# Altium PCB Memory Address Register.PcbDoc
Units mil, origin at the board's own origin, x right, y up, seen from the top; angles counter-clockwise.
Board outline 5200 x 2700 mil, 2 copper layers (Top Layer, Bottom Layer); 58 components, 97 nets, 466 pads, 0 vias.
Unrouted connection lines stored in the file: 298.
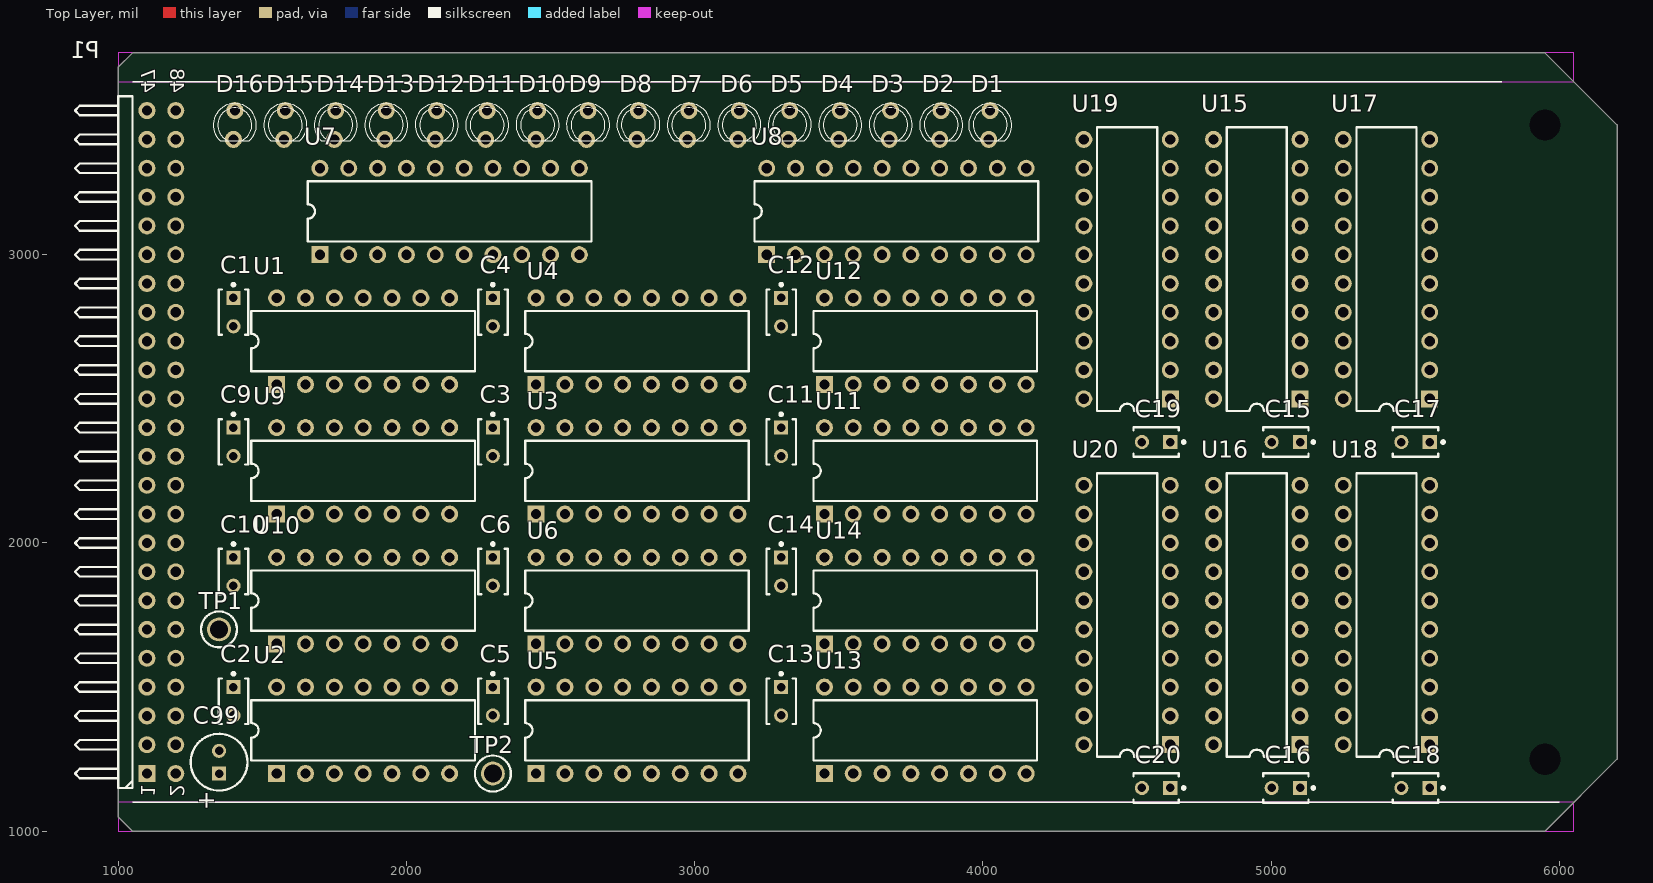
[diagram p0: Top Layer view]
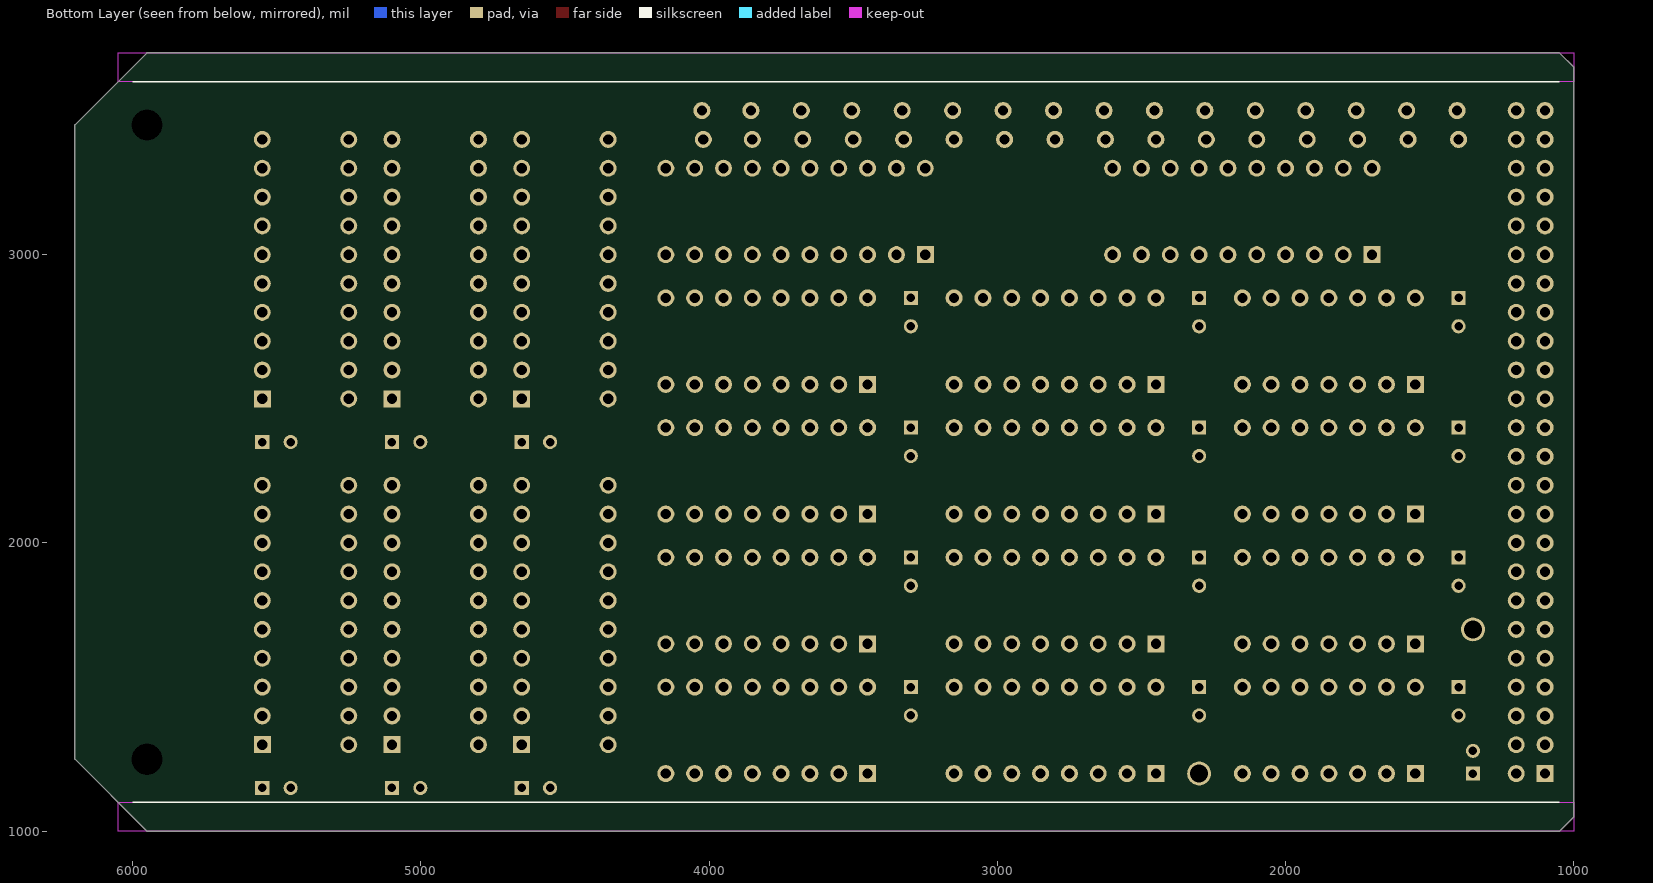
[diagram p1: Bottom Layer view, seen from below]

## Layer stack, top to bottom
Top Solder: solder mask 0.4, Solder Resist, Dk 3.5
Top Layer: signal copper 1.4
Dielectric 1: dielectric 12.6, FR-4, Dk 4.8
Bottom Layer: signal copper 1.4
Bottom Solder: solder mask 0.4, Solder Resist, Dk 3.5

## Board outline
1000,3650 1050,3700 5950,3700 6200,3450 6200,1250 5950,1000 1050,1000 1000,1050

## Design rules (kind name [scope] priority, off if disabled: settings)
Clearance [All] p1: gap=10 ignorepadtopadclearanceinfootprint=FALSE except(0: Arc-Hole Track-Hole SMDPad-Hole THPad-Hole Via-Hole Fill-Hole Poly-Hole Region-Hole Text-Hole)
PolygonConnect [All] p1: connectstyle=Relief reliefconductorwidth=10 reliefentries=4 polygonreliefangle="90 Angle" airgapwidth=10
RoutingVias [All] p1: holewidth=28 width=50 viastyle="Through Hole" minholewidth=28 minwidth=50 maxholewidth=28 maxwidth=50
SolderMaskExpansion [All] p1: expansion=4 istentingtop=FALSE
Width [All] p1: maxlimit=10 minlimit=10 preferedwidth=10
30 further rules are at their usual default settings.

## Classes and differential pairs
net class SAR[0..15]: SAR0 SAR1 SAR2 SAR3 SAR4 SAR5 SAR6 SAR7 SAR8 SAR9 SAR10 SAR11 SAR12 SAR13 SAR14 SAR15
net class MAR[0..15]: MAR0 MAR1 MAR2 MAR3 MAR4 MAR5 MAR6 MAR7 MAR8 MAR9 MAR10 MAR11 MAR12 MAR13 MAR14 MAR15
net class BUS[0..7]: BUS0 BUS1 BUS2 BUS3 BUS4 BUS5 BUS6 BUS7
net class ADDR[0..15]: ADDR0 ADDR1 ADDR2 ADDR3 ADDR4 ADDR5 ADDR6 ADDR7 ADDR8 ADDR9 ADDR10 ADDR11 ADDR12 ADDR13 ADDR14 ADDR15
component class SAR: C9 C10 C11 C12 C13 C14 C19 C20 U9 U10 U11 U12 U13 U14 U19 U20
component class MUX: C15 C16 C17 C18 U15 U16 U17 U18
component class Top: C99 D1 D2 D3 D4 D5 D6 D7 D8 D9 D10 D11 D12 D13 D14 D15 D16 P1 TP1 TP2 U1 U7 U8
component class MAR: C1 C2 C3 C4 C5 C6 U2 U3 U4 U5 U6

## Components (designator, comment, footprint, x,y, rotation, side; value= is the part's Value field where it differs from the comment)
C1 "K104K15X7RF5TL2" VISH-K104K15X7RF5TL2 1400,2800.79 r270 top
C2 "K104K15X7RF5TL2" VISH-K104K15X7RF5TL2 1400,1450.79 r270 top
C3 "K104K15X7RF5TL2" VISH-K104K15X7RF5TL2 2300,2350.79 r270 top
C4 "K104K15X7RF5TL2" VISH-K104K15X7RF5TL2 2300,2800.79 r270 top
C5 "K104K15X7RF5TL2" VISH-K104K15X7RF5TL2 2300,1450.79 r270 top
C6 "K104K15X7RF5TL2" VISH-K104K15X7RF5TL2 2300,1900.79 r270 top
C9 "K104K15X7RF5TL2" VISH-K104K15X7RF5TL2 1400,2350.79 r270 top
C10 "K104K15X7RF5TL2" VISH-K104K15X7RF5TL2 1400,1900.79 r270 top
C11 "K104K15X7RF5TL2" VISH-K104K15X7RF5TL2 3300,2350.79 r270 top
C12 "K104K15X7RF5TL2" VISH-K104K15X7RF5TL2 3300,2800.79 r270 top
C13 "K104K15X7RF5TL2" VISH-K104K15X7RF5TL2 3300,1450.79 r270 top
C14 "K104K15X7RF5TL2" VISH-K104K15X7RF5TL2 3300,1900.79 r270 top
C15 "K104K15X7RF5TL2" VISH-K104K15X7RF5TL2 5050.79,2350 r180 top
C16 "K104K15X7RF5TL2" VISH-K104K15X7RF5TL2 5050.79,1150 r180 top
C17 "K104K15X7RF5TL2" VISH-K104K15X7RF5TL2 5500.79,2350 r180 top
C18 "K104K15X7RF5TL2" VISH-K104K15X7RF5TL2 5500.79,1150 r180 top
C19 "K104K15X7RF5TL2" VISH-K104K15X7RF5TL2 4600.79,2350 r180 top
C20 "K104K15X7RF5TL2" VISH-K104K15X7RF5TL2 4600.79,1150 r180 top
C99 "Cap Pol5" C5x7 1350,1239.37 r90 top value=10uF
D1 "LED Red" "LED 3mm RED" 4025,3450 r270 top
D2 "LED Red" "LED 3mm RED" 3855,3450 r270 top
D3 "LED Red" "LED 3mm RED" 3680,3450 r270 top
D4 "LED Red" "LED 3mm RED" 3505,3450 r270 top
D5 "LED Red" "LED 3mm RED" 3330,3450 r270 top
D6 "LED Red" "LED 3mm RED" 3155,3450 r270 top
D7 "LED Red" "LED 3mm RED" 2980,3450 r270 top
D8 "LED Red" "LED 3mm RED" 2805,3450 r270 top
D9 "LED Red" "LED 3mm RED" 2630,3450 r270 top
D10 "LED Red" "LED 3mm RED" 2455,3450 r270 top
D11 "LED Red" "LED 3mm RED" 2280,3450 r270 top
D12 "LED Red" "LED 3mm RED" 2105,3450 r270 top
D13 "LED Red" "LED 3mm RED" 1930,3450 r270 top
D14 "LED Red" "LED 3mm RED" 1755,3450 r270 top
D15 "LED Red" "LED 3mm RED" 1580,3450 r270 top
D16 "LED Red" "LED 3mm RED" 1405,3450 r270 top
P1 "Memory Address Register" HDR2X24H 1100,1200 r90 top
TP1 "" KSTN-5011_V 1350,1700 r0 top
TP2 "" KSTN-5011_V 2300,1200 r0 top
U1 "SN74LS04N" N014 1850,2700 r0 top
U2 "SN74LS00N" N014 1850,1350 r0 top
U3 "SN74LS161AN" N016 2800,2250 r0 top
U4 "SN74LS161AN" N016 2800,2700 r0 top
U5 "SN74LS161AN" N016 2800,1350 r0 top
U6 "SN74LS161AN" N016 2800,1800 r0 top
U7 "SN74LS245N" N020 2150,3150 r0 top
U8 "SN74LS245N" N020 3700,3150 r0 top
U9 "SN74LS08N" N014 1850,2250 r0 top
U10 "SN74LS00N" N014 1850,1800 r0 top
U11 "SN74LS169BN" N016 3800,2250 r0 top
U12 "SN74LS169BN" N016 3800,2700 r0 top
U13 "SN74LS169BN" N016 3800,1350 r0 top
U14 "SN74LS169BN" N016 3800,1800 r0 top
U15 "SN74LS245N" N020 4950,2950 r90 top
U16 "SN74LS245N" N020 4950,1750 r90 top
U17 "SN74LS245N" N020 5400,2950 r90 top
U18 "SN74LS245N" N020 5400,1750 r90 top
U19 "SN74LS245N" N020 4500,2950 r90 top
U20 "SN74LS245N" N020 4500,1750 r90 top

## Footprints (in the part's own frame and the unit in brackets; to place one, negate y for a bottom-side part, rotate by r counter-clockwise, add the part's x,y. Pads: shape width x height; smd on the part's side, far side on the other; paste and mask are expansions set on the pad)
C5x7 [mm] "Capacitor; 2 Leads"
  rect 1.25x1.25 hole 0.75: 1(-1,0)
  round 1.25 hole 0.75: 2(1,0)
  silkscreen extent -2.5,-2.5 2.5,2.5, body extent -2.5,-2.5 2.5,2.5, height 7
HDR2X24H [mm] "Connector; Header; 24x2 Position; Right Angle"
  rect 1.5x1.5 hole 0.9: 1(0,0)
  round 1.5 hole 0.9: 2(0,-2.54) 3(2.54,0) 4(2.54,-2.54) 5(5.08,0) 6(5.08,-2.54) 7(7.62,0) 8(7.62,-2.54) 9(10.16,0) 10(10.16,-2.54) 11(12.7,0) 12(12.7,-2.54) 13(15.24,0) 14(15.24,-2.54) 15(17.78,0) 16(17.78,-2.54) 17(20.32,0) 18(20.32,-2.54) 19(22.86,0) 20(22.86,-2.54) 21(25.4,0) 22(25.4,-2.54) 23(27.94,0) 24(27.94,-2.54) 25(30.48,0) 26(30.48,-2.54) 27(33.02,0) 28(33.02,-2.54) 29(35.56,0) 30(35.56,-2.54) 31(38.1,0) 32(38.1,-2.54) 33(40.64,0) 34(40.64,-2.54) 35(43.18,0) 36(43.18,-2.54) 37(45.72,0) 38(45.72,-2.54) 39(48.26,0) 40(48.26,-2.54) 41(50.8,0) 42(50.8,-2.54) 43(53.34,0) 44(53.34,-2.54) 45(55.88,0) 46(55.88,-2.54) 47(58.42,0) 48(58.42,-2.54)
  silkscreen extent -1.27,1.27 59.69,6.35
KSTN-5011_V [mm] "Test Point, Dia 3.17mm"
  round 2.1 hole 1.6: 1(0,0)
  silkscreen extent -1.59,-1.58 1.59,1.58, body extent -1.59,-1.59 1.59,1.59, height 8.13
"LED 3mm RED" [mm]
  round 1.5 hole 0.9: 1(-1.27,0) 2(1.27,-0.127)
  silkscreen extent -1.9,-1.9 1.41,1.9, body extent -1.92,-1.92 1.65,1.92, height 5.3
N014 [mm] "DIP; 14 Leads; Row Spacing 7.62 mm; Pitch 2.54 mm"
  rect 1.5x1.5 hole 0.9: 1(-7.62,-3.81)
  round 1.5 hole 0.9: 2(-5.08,-3.81) 3(-2.54,-3.81) 4(0,-3.81) 5(2.54,-3.81) 6(5.08,-3.81) 7(7.62,-3.81) 8(7.62,3.81) 9(5.08,3.81) 10(2.54,3.81) 11(0,3.81) 12(-2.54,3.81) 13(-5.08,3.81) 14(-7.62,3.81)
  silkscreen extent -9.85,-2.65 9.85,2.65, body extent -9.15,-5.08 9.15,5.12, height 7.88
N016 [mm] "DIP; 16 Leads; Row Spacing 7.62 mm; Pitch 2.54 mm"
  rect 1.5x1.5 hole 0.9: 1(-8.89,-3.81)
  round 1.5 hole 0.9: 2(-6.35,-3.81) 3(-3.81,-3.81) 4(-1.27,-3.81) 5(1.27,-3.81) 6(3.81,-3.81) 7(6.35,-3.81) 8(8.89,-3.81) 9(8.89,3.81) 10(6.35,3.81) 11(3.81,3.81) 12(1.27,3.81) 13(-1.27,3.81) 14(-3.81,3.81) 15(-6.35,3.81) 16(-8.89,3.81)
  silkscreen extent -9.85,-2.65 9.85,2.65, body extent -10.46,-5.08 10.46,5.12, height 7.88
N020 [mm] "DIP; 20 Leads; Row Spacing 7.62 mm; Pitch 2.54 mm"
  rect 1.5x1.5 hole 0.9: 1(-11.43,-3.81)
  round 1.5 hole 0.9: 2(-8.89,-3.81) 3(-6.35,-3.81) 4(-3.81,-3.81) 5(-1.27,-3.81) 6(1.27,-3.81) 7(3.81,-3.81) 8(6.35,-3.81) 9(8.89,-3.81) 10(11.43,-3.81) 11(11.43,3.81) 12(8.89,3.81) 13(6.35,3.81) 14(3.81,3.81) 15(1.27,3.81) 16(-1.27,3.81) 17(-3.81,3.81) 18(-6.35,3.81) 19(-8.89,3.81) 20(-11.43,3.81)
  silkscreen extent -12.5,-2.65 12.5,2.65, body extent -13.08,-5.08 13.08,5.12, height 7.88
VISH-K104K15X7RF5TL2 [mm] "THD, 2-Leads, Body 4x2.6mm"
  rect 1.25x1.25 hole 0.75: 1(-1.25,0)
  round 1.25 hole 0.75: 2(1.25,0)
  silkscreen extent -2.55,-1.3 2,1.3, body extent -2,-1.3 2,1.3, height 5.6

## Part data
C1 C2 C3 C4 C5 C6 C9 C10 C11 C12 C13 C14 C15 C16 C17 C18 C19 C20: library part CMP-2000-06508-1, "Ceramic Capacitor, 100 nF, +/- 10%, 50 V, -55 to 125 degC, 2-Pin THD, RoHS, Tape and Reel", Capacitance=0.1µF, Manufacturer=Vishay, Operating Temperature=-55°C~125°C, Package / Case=Radial, Package Description="2-Pin Through Hole Device, Body 4 x 2.6 mm", Ratings=-, Standard Package=1, Temperature Coefficient=X7R, Tolerance=±10%, Voltage - Rated=50V, Applications=GeneralPurpose, Catalog Drawings=Mono-KapSide2-15_5.58Mono-KapSide1_15, Category=Capacitors, Datasheet URL=http://www.vishay.com/docs/45171/kseries.pdf, Datasheet Version=08/2013, Family=CeramicCapacitors, Features=-, Height - Seated (Max)="0.220\"(5.58mm)", Lead Spacing="0.098\"(2.50mm)", Lead Style=Straight, Manufacturer URL=http://www.vishay.com/, Mounting Technology=ThroughHole, Mounting Type=ThroughHole, Online Catalog=Mono-Kap™Series, Other Names=BC1084CT, Package Reference=K104K15X7RF5TL2, Packaging=CutTape(CT), Series=Mono-Kap™K, Size / Dimension="0.157\"Lx0.098\"W(4.00mmx2.50mm)", Thickness (Max)=-
C99: "Polarized Capacitor", LatestRevisionDate=17-Jul-2002, LatestRevisionNote="Re-released for DXP Platform.", PackageDescription="Polarized Capacitor; 2 Leads", PackageReference=POLAR0.8, Published=8-Jun-2000, Publisher="Altium Limited"
D1 D2 D3 D4 D5 D6 D7 D8 D9 D10 D11 D12 D13 D14 D15 D16: library part LED_Red
P1: library part "Header 24x2H", "Header, 24-Pin, Dual row, Right Angle", LatestRevisionDate=17-Jul-2002, LatestRevisionNote="Re-released for DXP Platform.", Publisher="Altium Limited", System=Connector
TP1 TP2: library part CMP-1672-00003-4, "Test Point, Black, Through Hole, RoHS, Bulk", Colour=Black, Manufacturer=Keystone, Package Quantity=100, ComponentLink1Description="Manufacturer URL", ComponentLink1URL=http://www.keyelco.com/, ComponentLink2Description=Datasheet, ComponentLink2URL=http://www.keyelco.com/product-pdf.cfm?p=1320, Contact Material=Bronze, Contact Plating=Silver, DatasheetVersion="Rev. F, 12/2013", Height="8.12 mm", Mount="Through Hole", Mounting Technology="Through Hole", PackageDescription="1-Pin Through Hole Device, Dia 3.17 mm", PackageReference=5011, Packaging=Bulk, Pins=1, REACH SVHC="No SVHC", RoHSCompliant=true
U1: "Hex Inverter", ComponentLink1Description="Manufacturer Link", ComponentLink1URL=http://www.ti.com/, ComponentLink2Description=Datasheet, ComponentLink2URL=http://www-s.ti.com/sc/ds/sn74ls04.pdf, DatasheetVersion=Mar-1988, LatestRevisionDate=04-Mar-2005, LatestRevisionNote="Stylized 3D Model Added.", PackageDescription="DIP; 14 Leads; Row Spacing 7.62 mm; Pitch 2.54 mm", PackageReference=N014, PackageVersion=Oct-1995, Published=8-Jun-2000, Publisher="Altium Limited"
U2 U10: "Quadruple 2-Input Positive-NAND Gate", ComponentLink1Description="Manufacturer Link", ComponentLink1URL=http://www.ti.com/, ComponentLink2Description=Datasheet, ComponentLink2URL=http://www-s.ti.com/sc/ds/sn74ls00.pdf, DatasheetVersion=Mar-1988, LatestRevisionDate=04-Mar-2005, LatestRevisionNote="Stylized 3D Model Added.", PackageDescription="DIP; 14 Leads; Row Spacing 7.62 mm; Pitch 2.54 mm", PackageReference=N014, PackageVersion=Oct-1995, Published=8-Jun-2000, Publisher="Altium Limited"
U3 U4 U5 U6: "Synchronous 4-Bit Counter", Code_JEDEC=MS-001-BB, ComponentLink1Description="Manufacturer Link", ComponentLink1URL=http://www.ti.com/, ComponentLink2Description=Datasheet, ComponentLink2URL=http://www-s.ti.com/sc/ds/sn74ls161a.pdf, ComponentLink3Description="URL Link1", ComponentLink3URL=http://focus.ti.com/docs/prod/folders/print/sn74ls161a.html, DatasheetVersion=Mar-1988, LatestRevisionDate=04-Mar-2005, LatestRevisionNote="Stylized 3D Model Added.", PackageDescription="DIP; 16 Leads; Row Spacing 7.62 mm; Pitch 2.54 mm", PackageReference=N016, PackageVersion=Oct-1995, Published=8-Jun-2000, Publisher="Altium Limited"
U7 U8 U15 U16 U17 U18 U19 U20: "Octal Bus Transceiver with 3-State Outputs", ComponentLink1Description="Manufacturer Link", ComponentLink1URL=http://www.ti.com/, ComponentLink2Description=Datasheet, ComponentLink2URL=http://www-s.ti.com/sc/ds/sn74ls245.pdf, DatasheetVersion=Mar-1988, LatestRevisionDate=04-Mar-2005, LatestRevisionNote="Stylized 3D Model Added.", PackageDescription="DIP; 20 Leads; Row Spacing 7.62 mm; Pitch 2.54 mm", PackageReference=N020, PackageVersion=Oct-1995, Published=8-Jun-2000, Publisher="Altium Limited"
U9: "Quadruple 2-Input Positive-AND Gate", ComponentLink1Description="Manufacturer Link", ComponentLink1URL=http://www.ti.com/, ComponentLink2Description=Datasheet, ComponentLink2URL=http://www-s.ti.com/sc/ds/SN74LS08.pdf, DatasheetVersion=Mar-1988, LatestRevisionDate=04-Mar-2005, LatestRevisionNote="Stylized 3D Model Added.", PackageDescription="DIP; 14 Leads; Row Spacing 7.62 mm; Pitch 2.54 mm", PackageReference=N014, PackageVersion=Oct-1995, Published=8-Jun-2000, Publisher="Altium Limited"
U11 U12 U13 U14: "Synchronous 4-Bit Up/Down Binary Counter", Code_JEDEC=MS-001-BB, ComponentLink1Description="Manufacturer Link", ComponentLink1URL=http://www.ti.com/, ComponentLink2Description=Datasheet, ComponentLink2URL=http://www-s.ti.com/sc/ds/sn74ls169b.pdf, DatasheetVersion=Mar-1988, LatestRevisionDate=04-Mar-2005, LatestRevisionNote="Stylized 3D Model Added.", PackageDescription="DIP; 16 Leads; Row Spacing 7.62 mm; Pitch 2.54 mm", PackageReference=N016, PackageVersion=Oct-1995, Published=8-Jun-2000, Publisher="Altium Limited"

## Free pads (board coordinates)
  round 0 hole 109: ""(5950,1250) ""(5950,3450)

## Nets (pads, with @x,y where several pads share a name; then routed paths per layer and width w, separated by ;. In a path a pad name is that pad's centre, name@x,y a point inside that pad or via, vN(x,y) a via of type N, cw(c..) or ccw(c..) an arc to the next point about the centre after c; other vN are vias at no path point)
ADDR0: P1.6 U15.18 U17.18
ADDR1: P1.8 U15.17 U17.17
ADDR2: P1.10 U15.16 U17.16
ADDR3: P1.12 U15.15 U17.15
ADDR4: P1.14 U15.14 U17.14
ADDR5: P1.16 U15.13 U17.13
ADDR6: P1.18 U15.12 U17.12
ADDR7: P1.20 U15.11 U17.11
ADDR8: P1.22 U16.18 U18.18
ADDR9: P1.24 U16.17 U18.17
ADDR10: P1.26 U16.16 U18.16
ADDR11: P1.28 U16.15 U18.15
ADDR12: P1.30 U16.14 U18.14
ADDR13: P1.32 U16.13 U18.13
ADDR14: P1.34 U16.12 U18.12
ADDR15: P1.36 U16.11 U18.11
ADDR16: P1.38
ADDR17: P1.40
ADDR18: P1.42
ADDR19: P1.44
BUS0: P1.25 U3.3 U5.3 U11.3 U13.3 U19.18 U20.18
BUS1: P1.23 U3.4 U5.4 U11.4 U13.4 U19.17 U20.17
BUS2: P1.21 U3.5 U5.5 U11.5 U13.5 U19.16 U20.16
BUS3: P1.19 U3.6 U5.6 U11.6 U13.6 U19.15 U20.15
BUS4: P1.17 U4.3 U6.3 U12.3 U14.3 U19.14 U20.14
BUS5: P1.15 U4.4 U6.4 U12.4 U14.4 U19.13 U20.13
BUS6: P1.13 U4.5 U6.5 U12.5 U14.5 U19.12 U20.12
BUS7: P1.11 U4.6 U6.6 U12.6 U14.6 U19.11 U20.11
CE#: U9.3 U11.10
CLK: P1.5 U3.2 U4.2 U5.2 U6.2 U11.2 U12.2 U13.2 U14.2
DS#: P1.48 U9.2 U11.1 U12.1 U13.1 U14.1
GND: C1.2 C2.2 C3.2 C4.2 C5.2 C6.2 C9.2 C10.2 C11.2 C12.2 C13.2 C14.2 C15.2 C16.2 C17.2 C18.2 C19.2 C20.2 C99.2 P1.3 P1.4 TP1.1 U1.7 U2.7 U3.8 U4.8 U5.8 U6.8 U7.10 U7.19 U8.10 U8.19 U9.7 U9.9 U9.10 U9.12 U9.13 U10.7 U11.7 U11.8 U12.7 U12.8 U13.7 U13.8 U14.7 U14.8 U15.10 U16.10 U17.10 U18.10 U19.10 U20.10
IS#: P1.46 U9.1
LD_S_LSB#: U10.3 U11.9 U12.9
LD_S_MSB#: U10.6 U13.9 U14.9
LM: U1.2 U2.4 U10.5 U10.12
LM#: P1.9 U1.1 U2.2 U10.2 U10.9
LOAD: P1.27 U2.11
LOAD_LSB#: U2.3 U3.9 U4.9
LOAD_MSB#: U2.6 U5.9 U6.9
MA: U1.4 U2.1 U2.5
MA#: P1.43 U1.3
MAR0: U3.14 U15.2
MAR1: U3.13 U15.3
MAR2: U3.12 U15.4
MAR3: U3.11 U15.5
MAR4: U4.14 U15.6
MAR5: U4.13 U15.7
MAR6: U4.12 U15.8
MAR7: U4.11 U15.9
MAR8: U5.14 U16.2
MAR9: U5.13 U16.3
MAR10: U5.12 U16.4
MAR11: U5.11 U16.5
MAR12: U6.14 U16.6
MAR13: U6.13 U16.7
MAR14: U6.12 U16.8
MAR15: U6.11 U16.9
MAR_OE#: U1.13 U2.8 U15.19 U16.19
MC: U1.6 U3.7 U3.10 U4.7 U5.7 U6.7
MC#: P1.45 U1.5
MI#: P1.37 U2.12
MO#: P1.31 U9.4
NetU3_15: U3.15 U4.10
NetU4_15: U4.15 U5.10
NetU5_15: U5.15 U6.10
NetU11_15: U11.15 U12.10
NetU12_15: U12.15 U13.10
NetU13_15: U13.15 U14.10
NI: U1.8 U10.1 U10.4
NI#: P1.39 U1.9
NO: U1.10 U10.10 U10.13
NO#: P1.33 U1.11
OUT#: P1.29 U9.6
OUT_LSB#: U10.8 U19.19
OUT_MSB#: U10.11 U20.19
RST#: P1.7 U3.1 U4.1 U5.1 U6.1
SAR0: U11.14 U17.2 U19.2
SAR1: U11.13 U17.3 U19.3
SAR2: U11.12 U17.4 U19.4
SAR3: U11.11 U17.5 U19.5
SAR4: U12.14 U17.6 U19.6
SAR5: U12.13 U17.7 U19.7
SAR6: U12.12 U17.8 U19.8
SAR7: U12.11 U17.9 U19.9
SAR8: U13.14 U18.2 U20.2
SAR9: U13.13 U18.3 U20.3
SAR10: U13.12 U18.4 U20.4
SAR11: U13.11 U18.5 U20.5
SAR12: U14.14 U18.6 U20.6
SAR13: U14.13 U18.7 U20.7
SAR14: U14.12 U18.8 U20.8
SAR15: U14.11 U18.9 U20.9
SAR_OE#: U1.12 U17.19 U18.19
SI#: P1.41 U2.9 U2.13
SO#: P1.35 U2.10 U9.5
VCC: C1.1 C2.1 C3.1 C4.1 C5.1 C6.1 C9.1 C10.1 C11.1 C12.1 C13.1 C14.1 C15.1 C16.1 C17.1 C18.1 C19.1 C20.1 C99.1 P1.1 P1.2 TP2.1 U1.14 U2.14 U3.16 U4.16 U5.16 U6.16 U7.1 U7.20 U8.1 U8.20 U9.14 U10.14 U11.16 U12.16 U13.16 U14.16 U15.1 U15.20 U16.1 U16.20 U17.1 U17.20 U18.1 U18.20 U19.1 U19.20 U20.1 U20.20
pads on no net: D1.1 D1.2 D2.1 D2.2 D3.1 D3.2 D4.1 D4.2 D5.1 D5.2 D6.1 D6.2 D7.1 D7.2 D8.1 D8.2 D9.1 D9.2 D10.1 D10.2 D11.1 D11.2 D12.1 D12.2 D13.1 D13.2 D14.1 D14.2 D15.1 D15.2 D16.1 D16.2 P1.47 U6.15 U7.2 U7.3 U7.4 U7.5 U7.6 U7.7 U7.8 U7.9 U7.11 U7.12 U7.13 U7.14 U7.15 U7.16 U7.17 U7.18 U8.2 U8.3 U8.4 U8.5 U8.6 U8.7 U8.8 U8.9 U8.11 U8.12 U8.13 U8.14 U8.15 U8.16 U8.17 U8.18 U9.8 U9.11 U14.15

## Keep-outs
Top Layer:
  rectangle: 1000,1000 6050,1100
  rectangle: 1000,3600 6050,3700
Bottom Layer:
  rectangle: 1000,3600 6050,3700
  rectangle: 1000,1000 6050,1100

## Silkscreen, mask and mechanical layers (free items; w line width, h text height)
Top Overlay:
  lines w5: 1050,1100 6000,1100 ; 1050,3600 5800,3600
Bottom Overlay:
  lines w5: 1050,1100 6000,1100 ; 1050,3600 6000,3600

## Text inside footprints (layer, text, board x,y; h text height)
C99: Top Overlay "+" at 1281.11,1140.94 h59.06 r270
P1: Top Overlay "48" at 1180,3560 h50 r270; Top Overlay "47" at 1080,3560 h50 r270; Top Overlay "1" at 1080,1120 h50 r270; Top Overlay "2" at 1180,1120 h50 r270